# Altium PCB TIDA-010056.PcbDoc (part 2 of 4)
Units mil, origin at the board's own origin, x right, y up, seen from the top; angles counter-clockwise.
Board outline 2716.54 x 2756 mil, 4 copper layers (Top Layer, GND, PWR, Bottom Layer), stack 63.2 mil thick; 152 components, 93 nets, 418 pads, 601 vias.
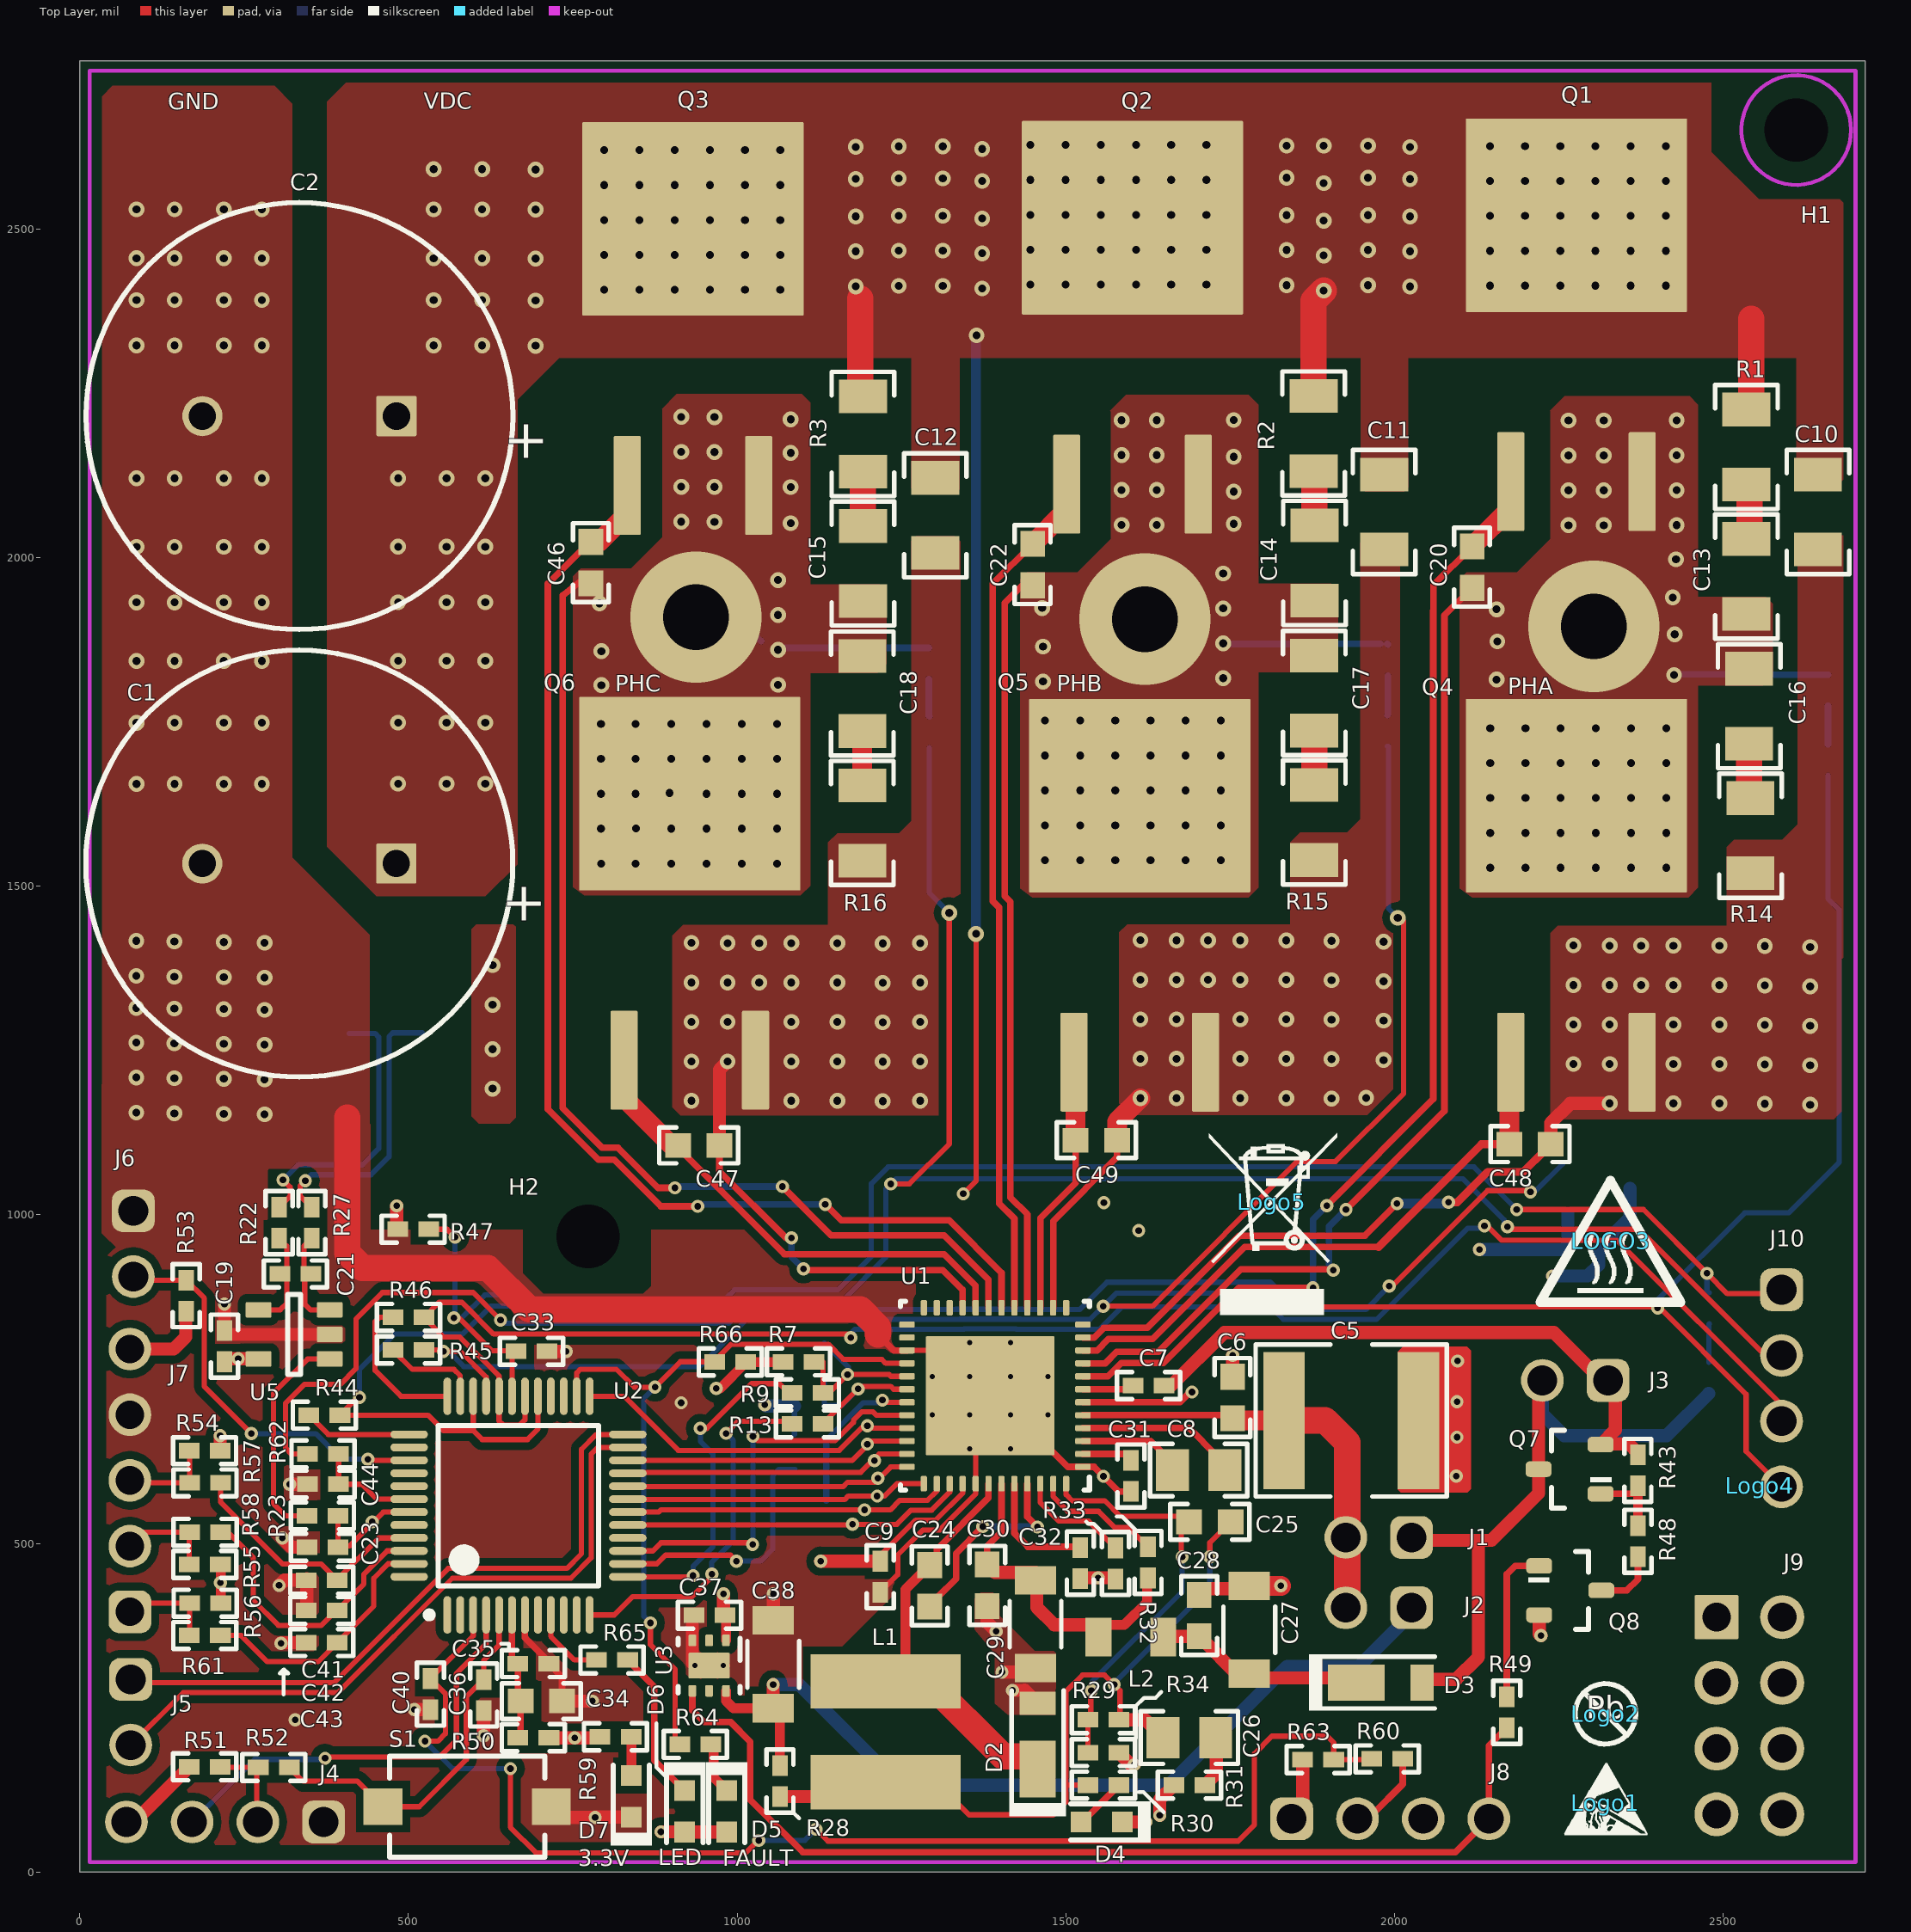
[diagram p0: Top Layer view]

## Part data (continued)
L1: library part CMP-0056063-1, "Inductor, Drum Core, Ferrite, 330 uH, 0.27 A, 2.25 ohm, SMD", Manufacturer=Bourns, Supplier Part Number 1=652-SDR0604-331KL, Value1="2.25 ohm", Value2=0.27A, ValueDisplayed=330uH, AEC Category=Q200, AEC Qualified=?, ComponentLink1Description="Datasheet link", ComponentLink1URL=http://www.bourns.com/data/global/pdfs/SDR0604.pdf, CompType=Inductor, DCR_Ohm=2.25, Green_EU RoHS=Passed, Green_EU RoHS-2=Incomplete, Green_Lifecycle=Active, Green_REACh=Passed, Imax_A=270mA, Ind_H=330µH, Irms="0.27A @ 40C rise", Isat="0.42A @ 10% inductance drop", LatestRevisionDate=2017-06-02, Material=Ferrite, MountType=SMT, PackageReference=5.8x4.8x5.8mm, PartNumber=SDR0604-331KL, Published=2008-06-26, Publisher="Texas Instruments", RoHS=Y, SizeArea_mm2=33.64, SizeAreaWB_mm2=60.84, SizeX_mm=5.8, SizeY_mm=5.8, SizeZ_mm=4.8, Supplier 1=Mouser, Supplier 2=Farnell, Supplier Part Number 2=1828017, Technology="Drum Core"
L2: library part CMP-0062507-2, "Inductor, Shielded, Ferrite, 33 uH, 0.085 A, 1.4 ohm, SMD", Manufacturer=TDK, PartNumber=NLFV25T-330K-PF, Supplier Part Number 1=445-1908-1-ND, Value1="1.4 ohm", Value2=0.085A, ValueDisplayed=33uH, AEC Category=Q200, AEC Qualified=?, ComponentLink1Description="Datasheet link", ComponentLink1URL=http://www.tdk.co.jp/tefe02/e511_nl_02.pdf, CompType=Inductor, DCR_Ohm=1.4, Green_EU RoHS="Passed with Exemption", Green_EU RoHS-2=Incomplete, Green_Lifecycle=Active, Green_REACh=Passed, Imax_A=85mA, Ind_H=33µH, Irms="0.085A @ 20C rise", Isat="0.085A @ 10% inductance drop", LatestRevisionDate=2017-06-02, Material=Ferrite, MountType=SMT, PackageReference=2.5x1.8x2mm, Published=2008-06-26, Publisher="Texas Instruments", RoHS=Y, SizeArea_mm2=4.5, SizeAreaWB_mm2=9.8, SizeX_mm=2.5, SizeY_mm=1.8, SizeZ_mm=2, Supplier 1=Digi-Key, Supplier 2=Mouser, Supplier Part Number 2=810-NLFV25T-330K, Technology=Shielded
Logo1: library part ESD_Susceptible, "ESD Susceptible Symbol", LatestRevisionDate=2016-03-21, Published=2009-03-03, Publisher="Texas Instruments", SymbolCreator=a0412235, SymbolVersion=2011-08-22
Logo2: library part Pb-Free, LatestRevisionDate=2016-03-21, Published=2009-03-03, Publisher="Texas Instruments", SymbolCreator=a0412235, SymbolVersion=2011-08-22
LOGO3: library part IEC_HotSurface, "IEC 61010-1 Hot Surface Warning", LatestRevisionDate=2016-03-21, Published=2009-03-03, Publisher="Texas Instruments", SymbolCreator=a0412235, SymbolVersion=2011-08-22
Logo4: library part FCC_disclaimer, "FCC_disclaimer", LatestRevisionDate=2014-11-20, Published=2009-03-03, Publisher="Texas Instruments", SymbolCreator=codlsc, SymbolVersion=2011-08-22
Logo5: library part CMP-0074769-1, Lib Reference="WEEE logo", PartNumber="WEEE logo"
Q1 Q2 Q3 Q4 Q5 Q6: library part CMP-0000966-3, "MOSFET, N-CH, 100 V, 200 A, KTT0002A (TO-263-2)", Alternate Manufacturer=None, Manufacturer="Texas Instruments", Supplier Part Number 1=296-41136-1-ND, Value2="118 nC", AEC Category=Q101, AEC Qualified=N, ChType=N, ComponentLink1Description="Datasheet link", ComponentLink1URL=http://www.ti.com/lit/ds/symlink/csd19536ktt.pdf, CompType=MOSFET, IdsMax_A=200A, MountType=SMT, PackageReference=KTT0002A, PartNumber=CSD19536KTT, QgTyp_nC=118, RoHS=Y, SizeArea_mm2=145.288, SizeAreaWB_mm2=198.208, SizeX_mm=14.3, SizeY_mm=10.16, SizeZ_mm=4.7, Supplier 1=Digi-Key, Supplier 2=Mouser, Supplier Part Number 2=595-CSD19536KTT, VdsMax_V=100V, Vgs_V=20V
Q7: library part CMP-0000366-2, "TRANS PNP 100V 1A SOT23-3", Manufacturer="Fairchild Semiconductor", Supplier Part Number 1=FMMT593CT-ND, Value1="1 A", AEC Category=Q101, AEC Qualified=N, ComponentLink1Description="Datasheet link", ComponentLink1URL=https://www.fairchildsemi.com/datasheets/BS/BSS63.pdf, CompType=BJT, IcRated_A="1 A", LatestRevisionDate=2017-03-09, MountType=SMT, NPN=0, PackageReference=SOT-23, PartNumber=FMMT593TA, PNP=1, Published=2008-07-31, Publisher="Texas Instruments", RoHS=Y, SizeArea_mm2=7.5, SizeAreaWB_mm2=14, SizeX_mm=2.5, SizeY_mm=3, SizeZ_mm=1.1, Supplier 1=Digi-Key, Supplier 2=Mouser, TaMax_C=150°C, TaMin_C=-55°C, U/M=EA, Vceo_V=100V, Vcesat1_V=250mV
Q8: library part CMP-0000489-2, "TRANS NPN 100V 1A SOT23-3", Manufacturer="Diodes Incorporated", Supplier Part Number 1=FMMT493CT-ND, Value1="1 A", Value2=1200, AEC Category=Q101, AEC Qualified=N, ComponentLink1Description="Datasheet link", ComponentLink1URL=https://sps06.itg.ti.com/sites/KMS/crossdivteams/altium/docs/ComponentDatasheets/DSC2C01_AED-21437.pdf, CompType=BJT, HfeMax=1200, IcRated_A="1 A", LatestRevisionDate=2017-03-09, MountType=SMT, NPN=1, PackageReference=SOT-23, PartNumber=FMMT493TA, PNP=0, Published=2008-07-31, Publisher="Texas Instruments", RoHS=Y, SizeArea_mm2=7.5, SizeAreaWB_mm2=14, SizeX_mm=2.5, SizeY_mm=3, SizeZ_mm=1.1, Supplier 1=Digi-Key, Supplier 2=Newark, Supplier 3=Mouser, TaMax_C=150°C, TaMin_C=-55°C, U/M=EA, Vceo_V=100V, Vcesat1_V=600mV
R1 R2 R3 R14 R15 R16: library part CMP-0016763-3, "RES, 1.50, 1%, 0.25 W, AEC-Q200 Grade 0, 1206", Manufacturer=Vishay-Dale, Power_W=250mW, Supplier Part Number 1=53K1888, TempCo="100 ppm/C", Tolerance_%=1%, Value2=0.25W, Value_Code=1R50, ValueDisplayed=1.50, AEC Category=Q200, AEC Grade=0, AEC Qualified=Y, ComponentLink1Description="Datasheet link", ComponentLink1URL=http://www.vishay.com/docs/20035/dcrcwe3.pdf, CompType=Resistor, EIA_Code=E96, MountType=SMT, PackageReference=1206, PartNumber=CRCW12061R50FKEA, Res_ohm=1.5, RoHS=E, SizeArea_mm2=5.12, SizeX_mm=3.2, SizeY_mm=1.6, SizeZ_mm=1.35, Supplier 1=Newark, Supplier 2=Mouser, Supplier 3=Farnell, Supplier Part Number 2=71-CRCW1206-1.5-E3, Supplier Part Number 3=1260858, Technology="Thick Film", Value1=1%, VDC_V=200V
R4 R28: library part CMP-0027004-2, "RES, 0, 5%, 0.063 W, 0402", Manufacturer="Yageo America", Power_W=63mW, Supplier Part Number 1=311-0.0JRCT-ND, TempCo="200 ppm/C", Tolerance_%=5%, Value2=0.063W, Value_Code=0000, ValueDisplayed=0, AEC Category=Q200, AEC Qualified=?, ComponentLink1Description="Datasheet link", ComponentLink1URL=http://www.yageo.com/pdf/Pu-RC0402_51_PbFree_L_2.pdf, CompType=Resistor, EIA_Code=E24, LatestRevisionDate=2017-03-09, MountType=SMT, PackageReference=0402, PartNumber=RC0402JR-070RL, Published=2008-06-26, Publisher="Texas Instruments", Res_ohm=0, RoHS=Y, SizeArea_mm2=0.5, SizeX_mm=1, SizeY_mm=0.5, SizeZ_mm=0.6, Supplier 1=Digi-Key, Supplier 2=Mouser, Supplier 3=Farnell, Supplier Part Number 2=603-RC0402JR-070RL, Supplier Part Number 3=9232516, Technology="Thick Film", U/M=EA, Value1=5%, VDC_V=50V
R5 R10: library part CMP-0026973-3, "RES, 75 k, 5%, 0.063 W, AEC-Q200 Grade 0, 0402", Manufacturer=Vishay-Dale, Power_W=63mW, Supplier Part Number 1=541-75KJCT-ND, TempCo="200 ppm/C", Tolerance_%=5%, Value2=0.063W, Value_Code=75k0, ValueDisplayed=75k, AEC Category=Q200, AEC Grade=0, AEC Qualified=Y, ComponentLink1Description="Datasheet link", ComponentLink1URL=http://www.vishay.com/docs/20035/dcrcwe3.pdf, CompType=Resistor, EIA_Code=E24, MountType=SMT, PackageReference=0402, PartNumber=CRCW040275K0JNED, Res_ohm=75k, RoHS=E, SizeArea_mm2=0.5, SizeX_mm=1, SizeY_mm=0.5, SizeZ_mm=0.6, Supplier 1=Digi-Key, Supplier 2=Newark, Supplier 3=Mouser, Supplier Part Number 2=89M6694, Supplier Part Number 3=71-CRCW040275K0JNED, Technology="Thick Film", Value1=5%, VDC_V=50V
R6 R8: library part CMP-0081723-1, "RES, 18.0 k, 1%, 0.1 W, AEC-Q200 Grade 0, 0402", Manufacturer=Panasonic, Power_W=100mW, Supplier Part Number 1=P18.0KLCT-ND, TempCo="100 ppm/C", Tolerance_%=1%, Value2=0.1W, Value_Code=18k0, ValueDisplayed=18.0k, AEC Category=Q200, AEC Grade=0, AEC Qualified=Y, ComponentLink1Description="Datasheet link", ComponentLink1URL=https://industrial.panasonic.com/cdbs/www-data/pdf/RDA0000/AOA0000C304.pdf, CompType=Resistor, MountType=SMT, PackageReference=0402, PartNumber=ERJ-2RKF1802X, Res_ohm=18k, RoHS=Y, SizeArea_mm2=0.5, SizeAreaWB_mm2=3, SizeX_mm=1, SizeY_mm=0.5, SizeZ_mm=0.6, Supplier 1=Digi-Key, Supplier 2=Newark, Supplier 3=Mouser, Supplier Part Number 2=85Y8155, Supplier Part Number 3=667-ERJ-2RKF1802X, Technology="Thick Film", Value1=1%
R7 R60 R62 R66: library part CMP-0026658-1, "RES, 10.0 k, 1%, 0.1 W, 0402", Manufacturer=Panasonic, Power_W=100mW, Supplier Part Number 1=P10.0KLCT-ND, TempCo="100 ppm/C", Tolerance_%=1%, Value2=0.1W, Value_Code=10k0, ValueDisplayed=10.0k, AEC Category=Q200, AEC Qualified=?, ComponentLink1Description="Datasheet link", ComponentLink1URL=http://industrial.panasonic.com/www-data/pdf/AOA0000/AOA0000CE2.pdf, CompType=Resistor, EIA_Code=E96, LatestRevisionDate=2017-03-09, MountType=SMT, PackageReference=0402, PartNumber=ERJ-2RKF1002X, Published=2008-06-26, Publisher="Texas Instruments", Res_ohm=10k, RoHS=Y, SizeArea_mm2=0.5, SizeX_mm=1, SizeY_mm=0.5, SizeZ_mm=0.6, Supplier 1=Digi-Key, Supplier 2=Newark, Supplier 3=Mouser, Supplier Part Number 2=90W2949, Supplier Part Number 3=667-ERJ-2RKF1002X, Technology="Thick Film", U/M=EA, Value1=1%, VDC_V=50V
R9 R13 R17 R23 R52 R57 R58 R61: library part CMP-0026993-2, "RES, 100, 5%, 0.1 W, AEC-Q200 Grade 0, 0402", Manufacturer=Panasonic, Power_W=100mW, Supplier Part Number 1=P100JCT-ND, TempCo="200 ppm/C", Tolerance_%=5%, Value2=0.1W, Value_Code=100R, ValueDisplayed=100, AEC Category=Q200, AEC Grade=0, AEC Qualified=Y, ComponentLink1Description="Datasheet link", ComponentLink1URL=https://industrial.panasonic.com/cdbs/www-data/pdf/RDA0000/AOA0000C84.pdf, CompType=Resistor, EIA_Code=E24, LatestRevisionDate=2017-03-09, MountType=SMT, PackageReference=0402, PartNumber=ERJ-2GEJ101X, Published=2008-06-26, Publisher="Texas Instruments", Res_ohm=100, RoHS=Y, SizeArea_mm2=0.5, SizeX_mm=1, SizeY_mm=0.5, SizeZ_mm=0.6, Supplier 1=Digi-Key, Supplier 2=Newark, Supplier 3=Farnell, Supplier Part Number 2=65T8246, Supplier Part Number 3=2059210, Technology="Thick Film", U/M=EA, Value1=5%
R22 R27: library part CMP-0025963-3, "RES, 10.0, 1%, 0.063 W, AEC-Q200 Grade 0, 0402", Manufacturer=Vishay-Dale, Power_W=63mW, Supplier Part Number 1=541-10.0LCT-ND, TempCo="100 ppm/C", Tolerance_%=1%, Value2=0.063W, Value_Code=10R0, ValueDisplayed=10.0, AEC Category=Q200, AEC Grade=0, AEC Qualified=Y, ComponentLink1Description="Datasheet link", ComponentLink1URL=http://www.vishay.com/docs/20035/dcrcwe3.pdf, CompType=Resistor, EIA_Code=E96, MountType=SMT, PackageReference=0402, PartNumber=CRCW040210R0FKED, Res_ohm=10, RoHS=E, SizeArea_mm2=0.5, SizeX_mm=1, SizeY_mm=0.5, SizeZ_mm=0.6, Supplier 1=Digi-Key, Supplier 2=Newark, Supplier 3=Mouser, Supplier Part Number 2=52K6600, Supplier Part Number 3=71-CRCW0402-10-E3, Technology="Thick Film", Value1=1%, VDC_V=50V
R24: library part CMP-0015748-2, "RES, 0.001, 1%, 3 W, AEC-Q200 Grade 0, 2512", Manufacturer=Bourns, Power_W=3W, Supplier Part Number 1=CRE2512-FZ-R001E-3CT-ND, TempCo="50 ppm/C", Tolerance_%=1%, Value_Code=1L000, ValueDisplayed=0.001, AEC Category=Q200, AEC Grade=0, AEC Qualified=Y, ComponentLink1Description="Datasheet link", ComponentLink1URL=http://www.bourns.com/docs/Product-Datasheets/CRE.pdf, CompType=Resistor, EIA_Code=E96, LatestRevisionDate=2017-03-09, MountType=SMT, PackageReference=2512, PartNumber=CRE2512-FZ-R001E-3, Published=2008-06-26, Publisher="Texas Instruments", Res_ohm=1m, RoHS=Y, SizeArea_mm2=21.6075, SizeX_mm=6.45, SizeY_mm=3.35, SizeZ_mm=0.9, Supplier 1=Digi-Key, Supplier 2=Newark, Supplier 3=Mouser, Supplier Part Number 2=78X4866, Supplier Part Number 3=652-CRE2512FZR001E-3, Technology="Metal Film", U/M=EA, Value1=1%, Value2=3W
R25: library part CMP-0015748-2, "RES, 0.001, 1%, 3 W, AEC-Q200 Grade 0, 2512", Manufacturer=Bourns, Power_W=3W, Supplier Part Number 1=CRE2512-FZ-R001E-3CT-ND, TempCo="50 ppm/C", Tolerance_%=1%, Value_Code=1L000, AEC Category=Q200, AEC Grade=0, AEC Qualified=Y, ComponentLink1Description="Datasheet link", ComponentLink1URL=http://www.bourns.com/docs/Product-Datasheets/CRE.pdf, CompType=Resistor, EIA_Code=E96, LatestRevisionDate=2017-03-09, MountType=SMT, PackageReference=2512, PartNumber=CRE2512-FZ-R001E-3, Published=2008-06-26, Publisher="Texas Instruments", Res_ohm=1m, RoHS=Y, SizeArea_mm2=21.6075, SizeX_mm=6.45, SizeY_mm=3.35, SizeZ_mm=0.9, Supplier 1=Digi-Key, Supplier 2=Newark, Supplier 3=Mouser, Supplier Part Number 2=78X4866, Supplier Part Number 3=652-CRE2512FZR001E-3, Technology="Metal Film", U/M=EA, Value1=1%, Value2=3W
R29 R30: library part CMP-0026162-2, "RES, 20.0 k, 1%, 0.063 W, AEC-Q200 Grade 0, 0402", Manufacturer=Vishay-Dale, Power_W=63mW, Supplier Part Number 1=541-20.0KLCT-ND, TempCo="100 ppm/C", Tolerance_%=1%, Value2=0.063W, Value_Code=20k0, ValueDisplayed=20.0k, AEC Category=Q200, AEC Grade=0, AEC Qualified=Y, ComponentLink1Description="Datasheet link", ComponentLink1URL=http://www.vishay.com/docs/20035/dcrcwe3.pdf, CompType=Resistor, EIA_Code=E96, MountType=SMT, PackageReference=0402, PartNumber=CRCW040220K0FKED, Res_ohm=20k, RoHS=E, SizeArea_mm2=0.5, SizeX_mm=1, SizeY_mm=0.5, SizeZ_mm=0.6, Supplier 1=Digi-Key, Supplier 2=Newark, Supplier 3=Mouser, Supplier Part Number 2=52K6817, Supplier Part Number 3=71-CRCW0402-20K-E3, Technology="Thick Film", Value1=1%, VDC_V=50V
R31: library part CMP-0026646-1, "RES, 0.91, 1%, 0.125 W, 0402", Manufacturer=Panasonic, Power_W=125mW, Supplier Part Number 1=P.91AKCT-ND, TempCo="250 ppm/C", Tolerance_%=1%, Value2=0.125W, Value_Code=R910, ValueDisplayed=0.91, AEC Category=Q200, AEC Qualified=?, ComponentLink1Description="Datasheet link", ComponentLink1URL=http://www.panasonic.com/industrial/components/pdf/AOA0000CE3.pdf, CompType=Resistor, EIA_Code=E96, LatestRevisionDate=2017-03-09, MountType=SMT, PackageReference=0402, PartNumber=ERJ-2BQFR91X, Published=2008-06-26, Publisher="Texas Instruments", Res_ohm=9.1d, RoHS=Y, SizeArea_mm2=0.5, SizeX_mm=1, SizeY_mm=0.5, SizeZ_mm=0.6, Supplier 1=Digi-Key, Supplier 2=Mouser, Supplier Part Number 2=667-ERJ-2BQFR91X, Technology="Thick Film", U/M=EA, Value1=1%
R32 R36 R37 R38 R40 R41 R42: library part CMP-0026193-2, "RES SMD 249K OHM 1% 1/16W 0402", Manufacturer=Yageo, Power_W=63mW, Supplier Part Number 1=311-249KLRCT-ND, TempCo="100 ppm/C", Tolerance_%=1%, Value2=0.063W, Value_Code=249k, AEC Category=Q200, AEC Grade=0, AEC Qualified=Y, ComponentLink1Description="Datasheet link", ComponentLink1URL=http://www.vishay.com/docs/20035/dcrcwe3.pdf, CompType=Resistor, EIA_Code=E96, MountType=SMT, PackageReference=0402, PartNumber=RC0402FR-07249KL, Res_ohm=249k, RoHS=E, SizeArea_mm2=0.5, SizeX_mm=1, SizeY_mm=0.5, SizeZ_mm=0.6, Supplier 1=Digi-Key, Supplier 2=Newark, Supplier 3=Mouser, Technology="Thick Film", Value1=1%, ValueDisplayed=249k, VDC_V=50V
R33: library part CMP-0081046-1, "RES, 133 k, 1%, 0.063 W, AEC-Q200 Grade 0, 0402", Manufacturer="Yageo America", Power_W=63mW, Supplier Part Number 1=YAG5259CT-ND, TempCo="100 ppm/C", Tolerance_%=1%, Value2=0.063W, Value_Code=133k, AEC Category=Q200, AEC Grade=0, AEC Qualified=Y, ComponentLink1Description="Datasheet link", ComponentLink1URL=http://www.yageo.com/NewPortal/yageodocoutput?fileName=/pdf/R-Chip/PYu-AC_51_RoHS_L_6.pdf, CompType=Resistor, EIA_Code=E96, MountType=SMT, PackageReference=0402, PartNumber=AC0402FR-07133KL, Res_ohm=133k, RoHS=Y, SizeArea_mm2=0.5, SizeAreaWB_mm2=3, SizeX_mm=1, SizeY_mm=0.5, SizeZ_mm=0.6, Supplier 1=Digi-Key, Supplier 2=Mouser, Supplier Part Number 2=603-AC0402FR-07133KL, Technology="Thick Film", Value1=1%, ValueDisplayed=133k, VDC_V=50V
R34: library part CMP-0026405-2, "RES SMD 4.02K OHM 1% 1/16W 0402", Manufacturer=Yageo, Power_W=63mW, Supplier Part Number 1=311-4.02KLRCT-ND, TempCo="100 ppm/C", Tolerance_%=1%, Value2=0.063W, Value_Code=4k02, ValueDisplayed=4.02k, AEC Category=Q200, AEC Grade=0, AEC Qualified=Y, ComponentLink1Description="Datasheet link", ComponentLink1URL=http://www.vishay.com/docs/20035/dcrcwe3.pdf, CompType=Resistor, EIA_Code=E96, MountType=SMT, PackageReference=0402, PartNumber=RC0402FR-074K02L, Res_ohm=4.02k, RoHS=E, SizeArea_mm2=0.5, SizeX_mm=1, SizeY_mm=0.5, SizeZ_mm=0.6, Supplier 1=Digi-Key, Supplier 2=Newark, Supplier 3=Mouser, Technology="Thick Film", Value1=1%, VDC_V=50V
R35 R39 R48 R53: library part CMP-0026245-2, "RES, 2.00 M, 1%, 0.063 W, AEC-Q200 Grade 0, 0402", Manufacturer=Vishay-Dale, Power_W=63mW, Supplier Part Number 1=541-2.00MLCT-ND, TempCo="100 ppm/C", Tolerance_%=1%, Value2=0.063W, Value_Code=2M00, ValueDisplayed=2.00M, AEC Category=Q200, AEC Grade=0, AEC Qualified=Y, ComponentLink1Description="Datasheet link", ComponentLink1URL=http://www.vishay.com/docs/20035/dcrcwe3.pdf, CompType=Resistor, EIA_Code=E96, MountType=SMT, PackageReference=0402, PartNumber=CRCW04022M00FKED, Res_ohm=2M, RoHS=E, SizeArea_mm2=0.5, SizeX_mm=1, SizeY_mm=0.5, SizeZ_mm=0.6, Supplier 1=Digi-Key, Supplier 2=Newark, Supplier 3=Mouser, Supplier Part Number 2=52K6816, Supplier Part Number 3=71-CRCW0402-2M-E3, Technology="Thick Film", Value1=1%, VDC_V=50V
R43: library part CMP-0026712-1, "RES, 97.6 k, 1%, 0.1 W, AEC-Q200 Grade 0, 0402", Manufacturer=Panasonic, Power_W=100mW, Supplier Part Number 1=P97.6KLCT-ND, TempCo="100 ppm/C", Tolerance_%=1%, Value2=0.1W, Value_Code=97k6, ValueDisplayed=97.6k, AEC Category=Q200, AEC Grade=0, AEC Qualified=Y, ComponentLink1Description="Datasheet link", ComponentLink1URL=http://industrial.panasonic.com/cdbs/www-data/pdf/RDA0000/AOA0000CE2.pdf, CompType=Resistor, EIA_Code=E96, LatestRevisionDate=2017-03-09, MountType=SMT, PackageReference=0402, PartNumber=ERJ-2RKF9762X, Published=2008-06-26, Publisher="Texas Instruments", Res_ohm=97.6k, RoHS=Y, SizeArea_mm2=0.5, SizeX_mm=1, SizeY_mm=0.5, SizeZ_mm=0.6, Supplier 1=Digi-Key, Supplier 2=Newark, Supplier 3=Mouser, Supplier Part Number 2=53W4505, Supplier Part Number 3=667-ERJ-2RKF9762X, Technology="Thick Film", U/M=EA, Value1=1%, VDC_V=50V
R44 R45 R46: library part CMP-0026186-2, "RES SMD 23.2K OHM 1% 1/16W 0402", Manufacturer=Yageo, Power_W=63mW, Supplier Part Number 1=YAG3066TR-ND, TempCo="100 ppm/C", Tolerance_%=1%, Value2=0.063W, Value_Code=23k2, ValueDisplayed=23.2k, AEC Category=Q200, AEC Grade=0, AEC Qualified=Y, ComponentLink1Description="Datasheet link", ComponentLink1URL=http://www.vishay.com/docs/20035/dcrcwe3.pdf, CompType=Resistor, EIA_Code=E96, MountType=SMT, PackageReference=0402, PartNumber=RC0402FR-0723K2L, Res_ohm=23.2k, RoHS=E, SizeArea_mm2=0.5, SizeX_mm=1, SizeY_mm=0.5, SizeZ_mm=0.6, Supplier 1=Digi-Key, Supplier 2=Newark, Supplier 3=Mouser, Technology="Thick Film", Value1=1%, VDC_V=50V
R47: library part CMP-0026675-1, "RES, 191 k, 1%, 0.1 W, AEC-Q200 Grade 0, 0402", Manufacturer=Panasonic, Power_W=100mW, Supplier Part Number 1=P191KLCT-ND, TempCo="100 ppm/C", Tolerance_%=1%, Value2=0.1W, Value_Code=191k, AEC Category=Q200, AEC Grade=0, AEC Qualified=Y, ComponentLink1Description="Datasheet link", ComponentLink1URL=http://industrial.panasonic.com/cdbs/www-data/pdf/RDA0000/AOA0000CE2.pdf, CompType=Resistor, EIA_Code=E96, LatestRevisionDate=2017-03-09, MountType=SMT, PackageReference=0402, PartNumber=ERJ-2RKF1913X, Published=2008-06-26, Publisher="Texas Instruments", Res_ohm=191k, RoHS=Y, SizeArea_mm2=0.5, SizeX_mm=1, SizeY_mm=0.5, SizeZ_mm=0.6, Supplier 1=Digi-Key, Supplier 2=Newark, Supplier 3=Mouser, Supplier Part Number 2=53W4261, Supplier Part Number 3=667-ERJ-2RKF1913X, Technology="Thick Film", U/M=EA, Value1=1%, ValueDisplayed=191k, VDC_V=50V
R49 R54 R55 R56: library part CMP-0026695-1, "RES, 3.30 k, 1%, 0.1 W, AEC-Q200 Grade 0, 0402", Manufacturer=Panasonic, Power_W=100mW, Supplier Part Number 1=P3.30KLCT-ND, TempCo="100 ppm/C", Tolerance_%=1%, Value2=0.1W, Value_Code=3k30, ValueDisplayed=3.30k, AEC Category=Q200, AEC Grade=0, AEC Qualified=Y, ComponentLink1Description="Datasheet link", ComponentLink1URL=http://industrial.panasonic.com/cdbs/www-data/pdf/RDA0000/AOA0000C86.pdf, CompType=Resistor, LatestRevisionDate=2017-03-09, MountType=SMT, PackageReference=0402, PartNumber=ERJ-2RKF3301X, Published=2008-06-26, Publisher="Texas Instruments", Res_ohm=3.3k, RoHS=Y, SizeArea_mm2=0.5, SizeX_mm=1, SizeY_mm=0.5, SizeZ_mm=0.6, Supplier 1=Digi-Key, Supplier 2=Newark, Supplier 3=Mouser, Supplier Part Number 2=64R5278, Supplier Part Number 3=667-ERJ-2RKF3301X, Technology="Thick Film", U/M=EA, Value1=1%, VDC_V=50V
R50: library part CMP-0026357-2, "RES, 3.32, 1%, 0.063 W, AEC-Q200 Grade 0, 0402", Manufacturer=Vishay-Dale, Power_W=63mW, Supplier Part Number 1=541-3.32LLCT-ND, TempCo="100 ppm/C", Tolerance_%=1%, Value2=0.063W, Value_Code=3R32, ValueDisplayed=3.32, AEC Category=Q200, AEC Grade=0, AEC Qualified=Y, ComponentLink1Description="Datasheet link", ComponentLink1URL=http://www.vishay.com/docs/20035/dcrcwe3.pdf, CompType=Resistor, EIA_Code=E96, MountType=SMT, PackageReference=0402, PartNumber=CRCW04023R32FKED, Res_ohm=3.32, RoHS=E, SizeArea_mm2=0.5, SizeX_mm=1, SizeY_mm=0.5, SizeZ_mm=0.6, Supplier 1=Digi-Key, Supplier 2=Mouser, Supplier 3=Farnell, Supplier Part Number 2=71-CRCW0402-3.32-E3, Supplier Part Number 3=1878586, Technology="Thick Film", Value1=1%, VDC_V=50V
R51: library part CMP-0026737-1, "RES, 47.0 k, 1%, 0.0625 W, 0402", Manufacturer="Yageo America", Power_W=62.5mW, Supplier Part Number 1=311-47.0KLRCT-ND, TempCo="100 ppm/C", Tolerance_%=1%, Value2=0.0625W, Value_Code=47k0, ValueDisplayed=47.0k, AEC Category=Q200, AEC Grade=N/A, AEC Qualified=N, ComponentLink1Description="Datasheet link", ComponentLink1URL=http://www.yageo.com/documents/recent/PYu-RC0402_51_RoHS_L_6_r.pdf, CompType=Resistor, LatestRevisionDate=2017-03-09, MountType=SMT, PackageReference=0402, PartNumber=RC0402FR-0747KL, Published=2008-06-26, Publisher="Texas Instruments", Res_ohm=47k, RoHS=Y, SizeArea_mm2=0.5, SizeX_mm=1, SizeY_mm=0.5, SizeZ_mm=0.6, Supplier 1=Digi-Key, Supplier 2=Newark, Supplier 3=Mouser, Supplier Part Number 2=67R9937, Supplier Part Number 3=603-RC0402FR-0747KL, Technology="Thick Film", U/M=EA, Value1=1%, VDC_V=50V
R59 R64 R65: library part CMP-0026657-1, "RES, 1.00 k, 1%, 0.1 W, 0402", Manufacturer=Panasonic, Power_W=100mW, Supplier Part Number 1=P1.00KLCT-ND, TempCo="100 ppm/C", Tolerance_%=1%, Value2=0.1W, Value_Code=1k00, ValueDisplayed=1.00k, AEC Category=Q200, AEC Qualified=?, ComponentLink1Description="Datasheet link", ComponentLink1URL=http://industrial.panasonic.com/www-data/pdf/AOA0000/AOA0000CE2.pdf, CompType=Resistor, EIA_Code=E96, LatestRevisionDate=2017-03-09, MountType=SMT, PackageReference=0402, PartNumber=ERJ-2RKF1001X, Published=2008-06-26, Publisher="Texas Instruments", Res_ohm=1k, RoHS=Y, SizeArea_mm2=0.5, SizeX_mm=1, SizeY_mm=0.5, SizeZ_mm=0.6, Supplier 1=Digi-Key, Supplier 2=Newark, Supplier 3=Mouser, Supplier Part Number 2=64R5247, Supplier Part Number 3=667-ERJ-2RKF1001X, Technology="Thick Film", U/M=EA, Value1=1%, VDC_V=50V